# Altium PCB CANSAT-Measurement-PWR-Charger PCB.PcbDoc
Units mm, origin at the board's own origin, x right, y up, seen from the top; angles counter-clockwise.
Board outline 56.01 x 18.03 mm, 2 copper layers (Top Layer, Bottom Layer); 23 components, 16 nets, 89 pads, 0 vias.
Unrouted connection lines stored in the file: 74.
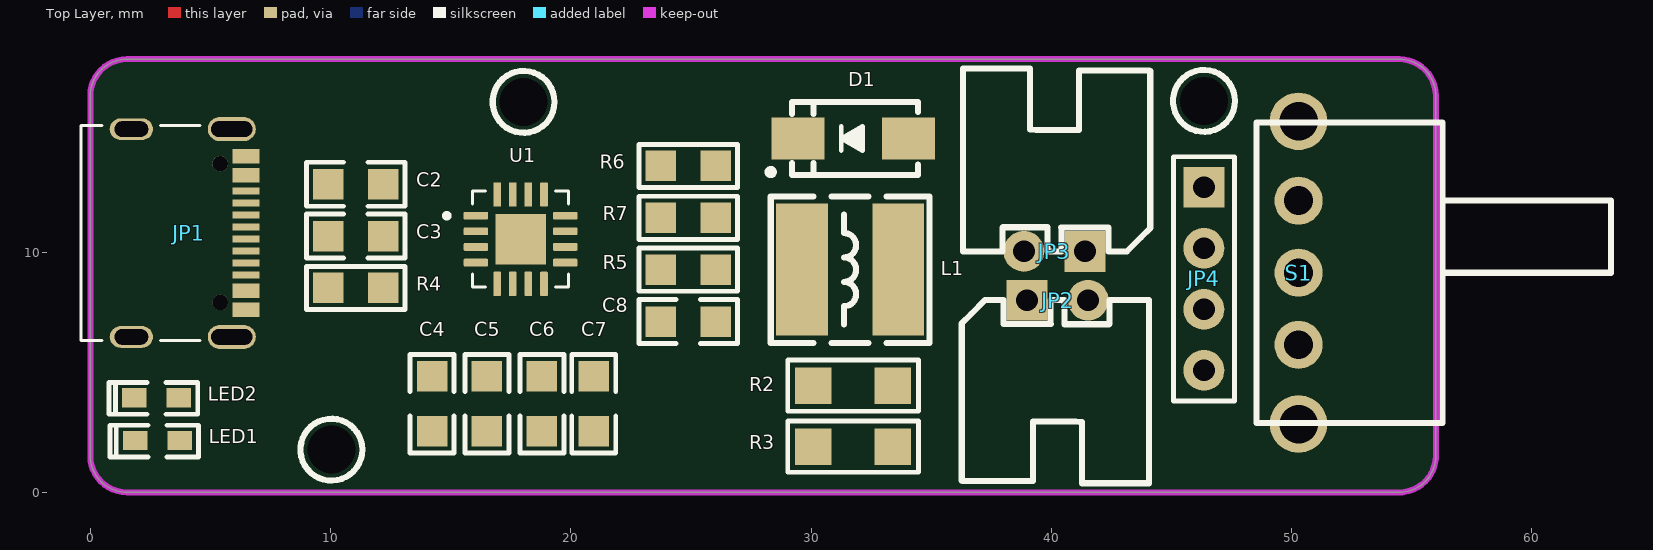
[diagram p0: Top Layer view]
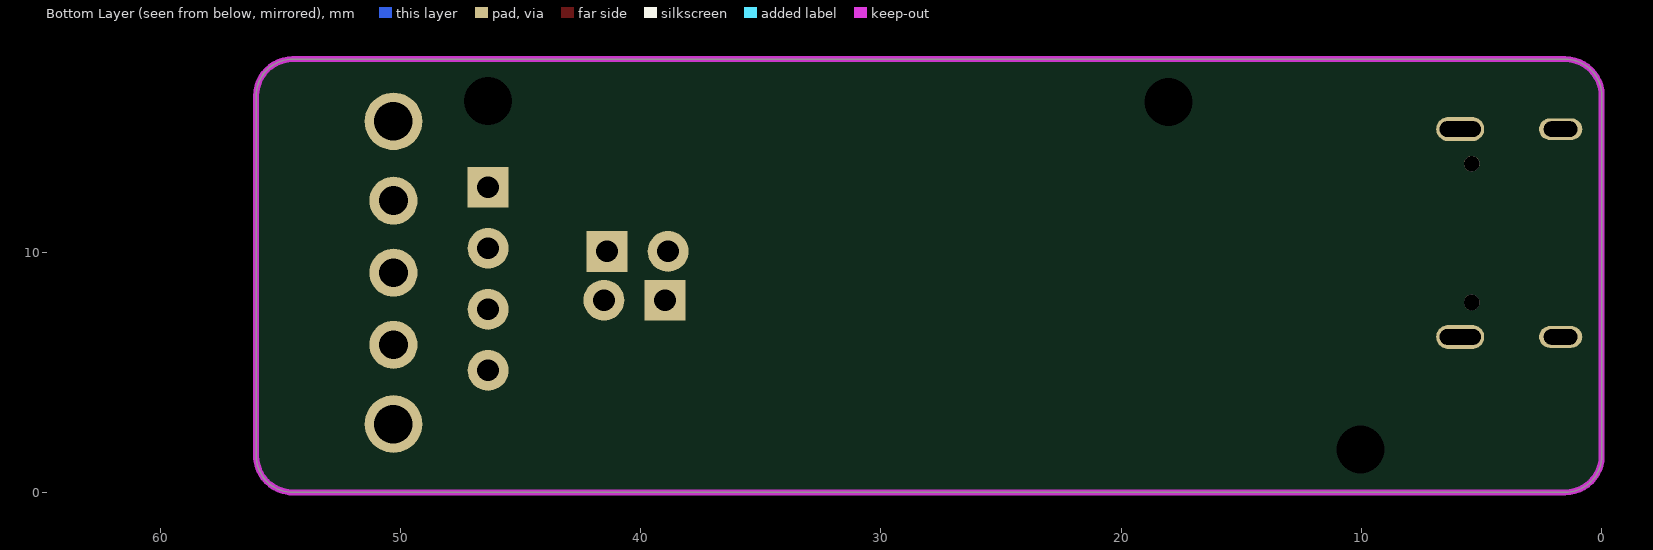
[diagram p1: Bottom Layer view, seen from below]

## Layer stack, top to bottom
Top Solder: solder mask 0.0102, Solder Resist, Dk 3.5
Top Layer: signal copper 0.0356
Dielectric 1: dielectric 0.32, FR-4, Dk 4.8
Bottom Layer: signal copper 0.0356
Bottom Solder: solder mask 0.0102, Solder Resist, Dk 3.5

## Board outline
1.524,0 cw(c1.524,1.524) 0,1.524 0,16.51 cw(c1.524,16.51) 1.524,18.034 54.483,18.034 cw(c54.483,16.51) 56.007,16.51 56.007,1.524 cw(c54.483,1.524) 54.483,0

## Design rules (kind name [scope] priority, off if disabled: settings)
Clearance [All] p1: gap=0.178 ignorepadtopadclearanceinfootprint=FALSE
PolygonConnect [All] p1: connectstyle=Relief reliefconductorwidth=0.254 reliefentries=4 polygonreliefangle="90 Angle" airgapwidth=0.254
RoutingVias [All] p1: holewidth=0.711 width=1.27 viastyle="Through Hole" minholewidth=0.711 minwidth=1.27 maxholewidth=0.711 maxwidth=1.27
SolderMaskExpansion [All] p1: expansion=0.102 istentingtop=FALSE
Width [All] p1: maxlimit=0.254 minlimit=0.254 preferedwidth=0.254
30 further rules are at their usual default settings.

## Components (designator, comment, footprint, x,y, rotation, side; value= is the part's Value field where it differs from the comment)
C2 "10uF" "C 0805" 11.049,12.827 r0 top
C3 "100nF" "C 0805" 11.049,10.668 r0 top
C4 "10uF" "C 0805" 14.224,3.683 r90 top
C5 "100nF" "C 0805" 16.51,3.683 r90 top
C6 "10uF" "C 0805" 18.796,3.683 r90 top
C7 "100nF" "C 0805" 20.955,3.683 r90 top
C8 "100nF" "C 0805" 24.892,7.112 r180 top
D1 "M7" SMA 31.75,14.732 r180 top
JP1 "USB-C" USB-C-RIGHT 2.54,11.049 r270 top
JP2 "HDR-1X2" XH2.54-2P_H 38.989,8.001 r0 top
JP3 "HDR-1X2" XH2.54-2P_H 41.402,10.033 r180 top
JP4 "HDR-1X4" HDR-1X4 46.355,12.7 r270 top
L1 "22uH" CD54 31.623,9.271 r0 top
LED1 "LED-SMD" "LED 0603R" 2.794,2.159 r180 top
LED2 "LED-SMD" "LED 0603B" 2.756,3.937 r180 top
R2 "=Value" "R 1206" 31.75,4.445 r0 top
R3 "=Value" "R 1206" 31.75,1.905 r0 top
R4 "5.6K" "R 0805" 11.049,8.509 r0 top
R5 "=Value" "R 0805" 24.892,9.271 r0 top
R6 "50K" "R 0805" 24.892,13.589 r0 top
R7 "=Value" "R 0805" 24.892,11.43 r0 top
S1 "SS-12F23" SS-12F23 50.292,9.144 r0 top
U1 "TP5100" QFN16_4*4 17.907,10.566 r0 top

## Footprints (in the part's own frame and the unit in brackets; to place one, negate y for a bottom-side part, rotate by r counter-clockwise, add the part's x,y. Pads: shape width x height; smd on the part's side, far side on the other; paste and mask are expansions set on the pad)
"C 0805" [mil] "ï¿½Þ¼ï¿½ï¿½ï¿½ï¿½ï¿½Æ¬ï¿½ï¿½ï¿½ï¿½"
  rect 50x50 smd: 1(-45,0) 2(45,0)
  silkscreen extent -81,-36 81,36, body extent -39,-24 39,24, height 20
CD54 [mm] "5.8*5.2*4.5mm£¨³¤¿í¸ß£©"
  rect 2.15x5.5 smd: 1(-2,0) 2(2,0)
  silkscreen extent -3.3,-3.05 3.3,3.05, body extent -2.87,-2.5 2.87,2.5, height 4
HDR-1X4 [mm] "ï¿½ï¿½ï¿½ë£¬4ï¿½ï¿½"
  rect 1.7x1.7 hole 0.9: 1(0,0)
  round 1.7 hole 0.9: 2(2.54,0) 3(5.08,0) 4(7.62,0)
  silkscreen extent -1.27,-1.27 8.89,1.27, body extent -1.27,-1.27 8.89,1.27, height 8.5
"LED 0603B" [mil] "ï¿½ï¿½É«0603LED"
  rect 40x31.5 smd: 1(-36.5,0) 2(36.5,0)
  silkscreen extent -68,-25 78,27, body extent -31,-16 32,16, height 24
"LED 0603R" [mm] "ï¿½ï¿½É«0603LED"
  rect 1.016x0.8 smd: 1(-0.927,0) 2(0.927,0)
  silkscreen extent -1.71,-0.63 1.98,0.69, body extent -0.8,-0.4 0.8,0.4, height 0.61
QFN16_4*4 [mm]
  rrect25% 1.01x0.32 smd: 1(-1.86,0.95) 2(-1.86,0.3) 3(-1.86,-0.35) 4(-1.86,-1) 9(1.86,-1) 10(1.86,-0.35) 11(1.86,0.3) 12(1.86,0.95)
  rrect25% 0.32x1.01 smd: 5(-0.975,-1.885) 6(-0.325,-1.885) 7(0.325,-1.885) 8(0.975,-1.885) 13(0.975,1.835) 14(0.325,1.835) 15(-0.325,1.835) 16(-0.975,1.835)
  rect 2.1x2.1 smd paste-0.39: 17(0,-0.025)
  silkscreen extent -3.17,-2.03 2,1.97, body extent -2,-2.03 2,1.97, height 0.9
"R 0805" [mm] "1/8Wï¿½ï¿½Æ¬ï¿½ï¿½ï¿½ï¿½"
  rect 1.27x1.27 smd: 1(-1.143,0) 2(1.143,0)
  silkscreen extent -2.05,-0.9 2.05,0.9, body extent -1,-0.62 1,0.63, height 0.5
"R 1206" [mil] "1/4Wï¿½ï¿½Æ¬ï¿½ï¿½ï¿½ï¿½"
  rect 60x60 smd: 1(-65,0) 2(65,0)
  silkscreen extent -107,-42 107,42, body extent -63,-31 63,32, height 22
SMA [mm] "4.5x2.6*2.2mm£¨³¤¿í¸ß£¬²»°üÀ¨Òý½Å£©"
  rect 2.2x1.75 smd: 1(-2.3,0) 2(2.3,0)
  silkscreen extent -2.7,-1.52 3.56,1.52, body extent -2.53,-1.3 2.58,1.3, height 2.15
SS-12F23 [mm] "ï¿½Å¾ï¿½3mm"
  round 2.4 hole 1.6: 0(0,-6.3) 0(0,6.3)
  round 2 hole 1.2: 1(0,3) 2(0,0) 3(0,-3)
  silkscreen extent -1.75,-6.25 13,6.25, body extent -0.61,-6.52 12.29,6.48, height 5.75
USB-C-RIGHT [mm]
  rect 0.3x1.14 smd: A1(-3.096,3.937) A4(-2.296,3.937) A5(-0.996,3.937) A6(0.004,3.937) A7(0.504,3.937) A8(1.504,3.937) A9(2.804,3.937) A12(3.604,3.937) B1(3.304,3.937) B4(2.504,3.937) B5(2.004,3.937) B6(1.004,3.937) B7(-0.496,3.937) B8(-1.496,3.937) B9(-1.996,3.937) B12(-2.796,3.937)
  oval 1x2 hole 0.65 slot 1.72 at 90 deg: S1(-4.071,3.347) S2(4.579,3.347)
  oval 0.9x1.8 hole 0.65 slot 1.4 at 90 deg: S3(-4.071,-0.833) S4(4.579,-0.833)
  round 0.65 hole 0.65 unplated: ""(-2.636,2.867) ""(3.144,2.867)
  silkscreen extent -4.22,-2.92 4.72,2.03, body extent -4.22,-3.36 4.72,4.39, height 3.26
XH2.54-2P_H [mm] "½Ó²å¼þ£¬2P"
  rect 1.7x1.7 hole 0.9: 1(0,0)
  round 1.7 hole 0.9: 2(2.54,0)
  silkscreen extent -2.72,-7.62 5.08,0, body extent -2.5,-7.35 5.04,0.35, height 5.73

## Part data
C2 C3 C4 C5 C6 C7 C8: library part C, "Non-polar patch capacitor", BOM名称=无极性贴片电容, 学习资源=www.ooocke.com, 版权归属=源创客
D1: "Rectifier diode", BOM名称=整流二极管, 学习资源=www.ooocke.com, 版权归属=源创客
JP1: library part USB-C-RIGHT
JP2 JP3: library part "Header 2", "2P Connector", BOM名称=2P接插件, 学习资源=www.ooocke.com, 版权归属=源创客
JP4: library part "Header 4", "4P Connector", BOM名称=4P接插件, 学习资源=www.ooocke.com, 版权归属=源创客
L1: library part L-CD, "Chip power inductor", BOM名称=功率电感, 学习资源=www.ooocke.com, 版权归属=源创客
LED1 LED2: "Patch LED", BOM名称=贴片LED, 学习资源=www.ooocke.com, 版权归属=源创客
R2 R3 R4 R5 R6 R7: library part R, "Chip resistor", BOM名称="Chip resistor", 学习资源=www.ooocke.com, 版权归属=源创客
S1: library part SSW-1P, "1-Way Sliding Switch", BOM名称=波动开关, 学习资源=www.ooocke.com, 版权归属=源创客
U1: "Battery Charger"

## Free pads (board coordinates)
  round 1.524 hole 2: 4(10.033,1.778) 4(18.034,16.256) 4(46.355,16.297)

## Nets (pads, with @x,y where several pads share a name; then routed paths per layer and width w, separated by ;. In a path a pad name is that pad's centre, name@x,y a point inside that pad or via, vN(x,y) a via of type N, cw(c..) or ccw(c..) an arc to the next point about the centre after c; other vN are vias at no path point)
12V: C2.2 C3.2 JP1.A4 JP1.A9 JP1.B4 JP1.B9 R4.1 U1.1 U1.4 U1.5 U1.16
GND: C2.1 C3.1 C4.1 C5.1 C6.1 C7.1 C8.1 D1.1 JP1.A1 JP1.A12 JP1.B1 JP1.B12 JP1.S1 JP1.S2 JP1.S3 JP1.S4 JP2.2 JP3.2 JP4.3 JP4.4 R5.2 R6.2 U1.7 U1.17
NetC4_2: C4.2 C5.2 L1.2 R2.1 R3.1 U1.8
NetD1_2: D1.2 L1.1 U1.2 U1.3
NetJP1_A2: 
NetJP1_A10: 
NetJP1_B2: 
NetJP1_B10: 
NetJP3_1: JP3.1 JP4.1 JP4.2 S1.1
NetLED1_1: LED1.1 LED2.1 R4.2
NetLED1_2: LED1.2 U1.15
NetLED2_2: LED2.2 U1.14
NetR5_1: R5.1 R7.2 U1.11
NetR6_1: R6.1 U1.12
TP5100_CS: C8.2 R7.1 U1.10 U1.13
VBAT: C6.2 C7.2 JP2.1 R2.2 R3.2 S1.2 U1.9
pads on no net: JP1. JP1.A5 JP1.A6 JP1.A7 JP1.A8 JP1.B5 JP1.B6 JP1.B7 JP1.B8 S1.0 S1.3 U1.6

## Keep-outs
Keep-Out Layer:
  lines w0.254: 54.483,0 ccw(c54.483,1.524) 56.007,1.524 ; 54.61,0 49.022,0 1.524,0 cw(c1.524,1.524) 0,1.524 0,16.51 cw(c1.524,16.51) 1.524,18.034 54.483,18.034 cw(c54.483,16.51) 56.007,16.51 56.007,1.397

## Silkscreen, mask and mechanical layers (free items; w line width, h text height)
Top Overlay:
  circle w0.254: c46.355,16.297 r1.288
  circle w0.254: c10.033,1.778 r1.288
  circle w0.254: c18.034,16.256 r1.288